# Altium PCB CLASS_AB.PcbDoc
Units mm, origin at the board's own origin, x right, y up, seen from the top; angles counter-clockwise.
Board outline 85.72 x 49.91 mm, 2 copper layers (Top Layer, Bottom Layer); 29 components, 15 nets, 63 pads, 0 vias.
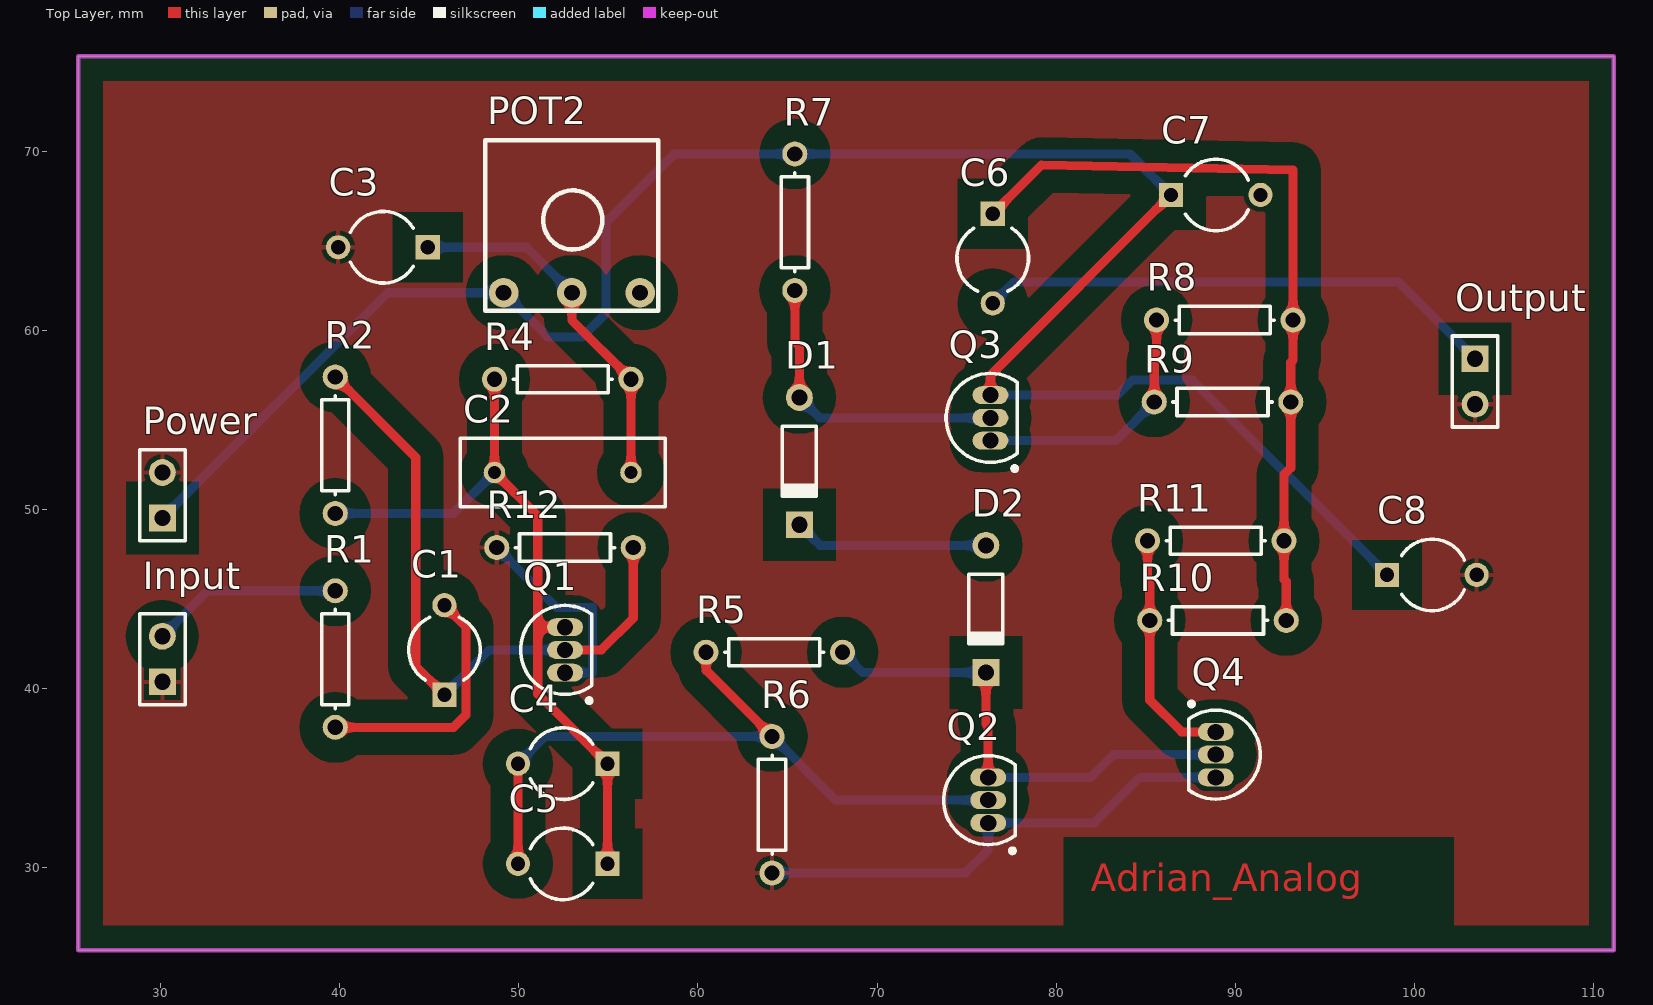
[diagram p0: Top Layer view]
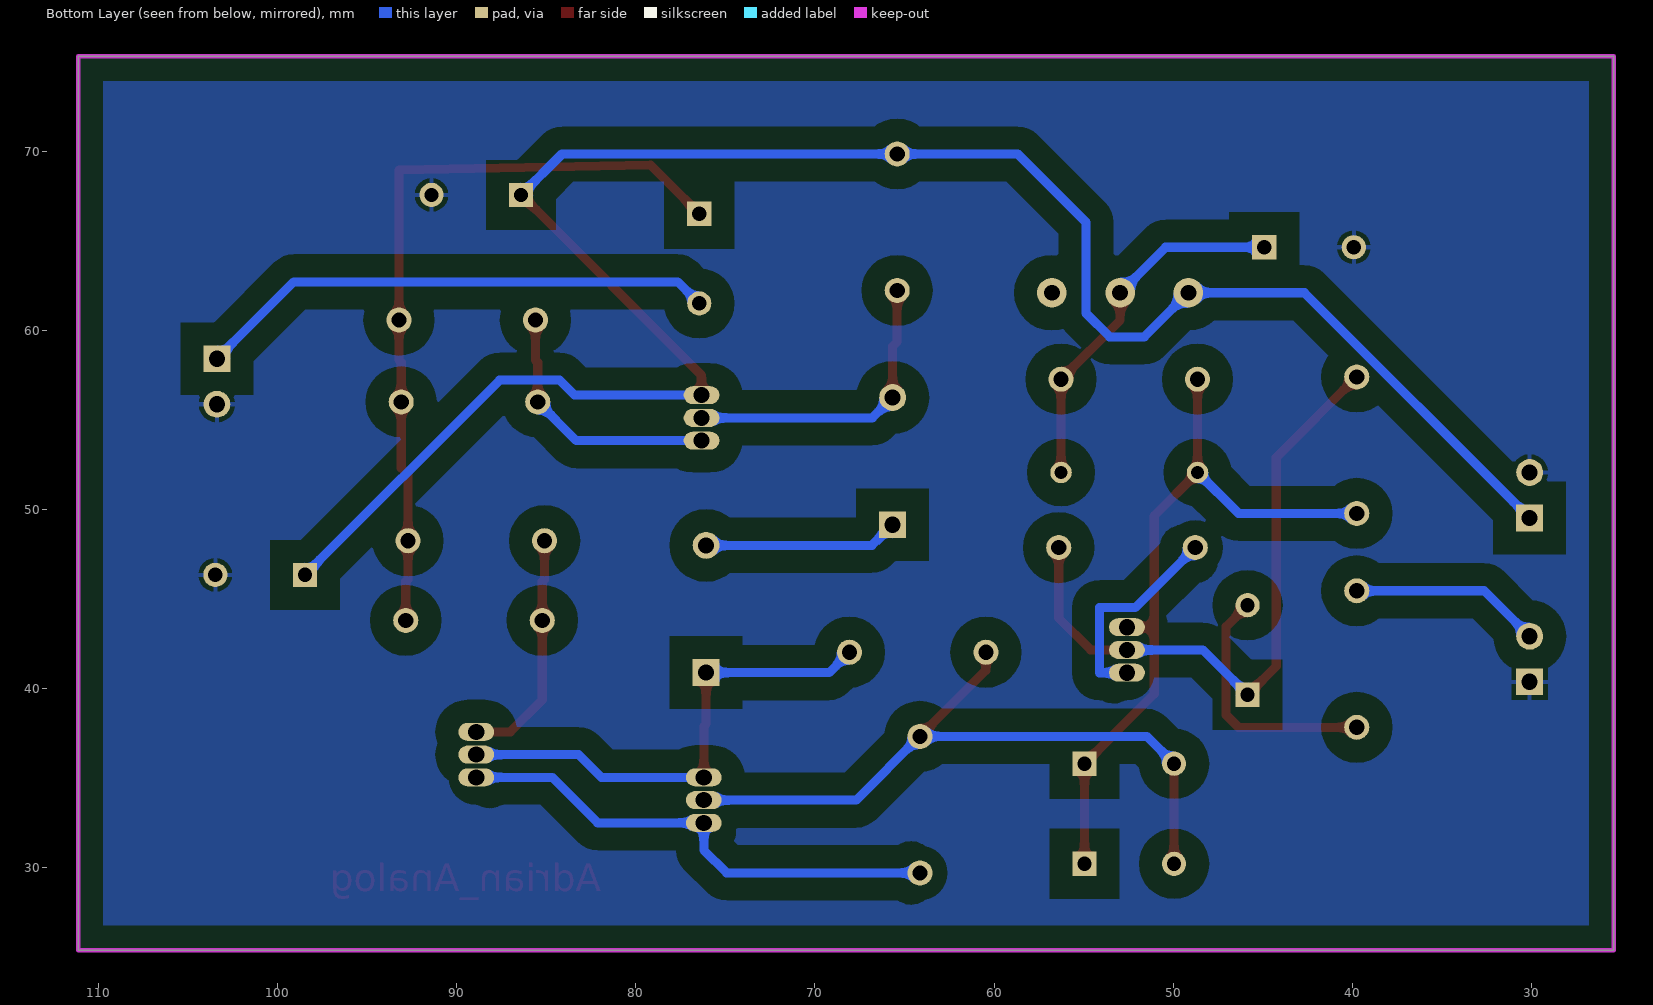
[diagram p1: Bottom Layer view, seen from below]

## Layer stack, top to bottom
Top Solder: solder mask 0.0102, Solder Resist, Dk 3.5
Top Layer: signal copper 0.0356
Dielectric 1: dielectric 0.32, FR-4, Dk 4.8
Bottom Layer: signal copper 0.0356
Bottom Solder: solder mask 0.0102, Solder Resist, Dk 3.5

## Board outline
25.4,25.4 25.4,75.311 111.125,75.311 111.125,25.4

## Design rules (kind name [scope] priority, off if disabled: settings)
Clearance "Copper Pour" [InPolygon] p1: gap=1.27
Clearance [All] p2: gap=0.254
PolygonConnect [All] p1: connectstyle=Relief reliefconductorwidth=0.254 reliefentries=4 polygonreliefangle="90 Angle" airgapwidth=0.254
RoutingVias [All] p1: holewidth=0.711 width=1.27 viastyle="Through Hole" minholewidth=0.711 minwidth=1.27 maxholewidth=0.711 maxwidth=1.27
SolderMaskExpansion [All] p1: expansion=0.102
Width [All] p1: maxlimit=0.508 minlimit=0.508 preferedwidth=0.508
30 further rules are at their usual default settings.

## Components (designator, comment, footprint, x,y, rotation, side; value= is the part's Value field where it differs from the comment)
C1 "Cap2" CAPR5-4X5 45.847,42.164 r90 top
C2 "Cap" RAD-0.3 52.451,52.07 r0 top
C3 "Cap2" CAPR5-4X5 42.418,64.643 r180 top
C4 "Cap2" CAPR5-4X5 52.451,35.814 r180 top
C5 "Cap2" CAPR5-4X5 52.451,30.226 r180 top
C6 "Cap2" CAPR5-4X5 76.454,64.008 r270 top
C7 "Cap2" CAPR5-4X5 88.9,67.564 r0 top
C8 "Cap2" CAPR5-4X5 100.965,46.355 r0 top
D1 "Diode 1N914" DO-35 65.659,52.705 r270 top
D2 "Diode 1N914" DO-35 76.073,44.45 r270 top
Input "Header 2" HDR1X2 30.099,40.386 r90 top
Output "Header 2" HDR1X2 103.378,58.42 r270 top
POT2 "RPot_1" "POT inline wide" 50.419,62.103 r0 top
Power "Header 2" HDR1X2 30.099,49.53 r90 top
Q1 "2N2222" TO-92A 52.578,42.164 r0 top
Q2 "2N2222" TO-92A 76.2,33.782 r0 top
Q3 "2N2222" TO-92A 76.327,55.118 r0 top
Q4 "2N2907" TO-92A 88.9,36.322 r180 top
R1 "Res1" AXIAL-0.3 39.751,41.656 r270 top
R2 "Res2" AXIAL-0.3 39.751,53.594 r90 top
R4 "Res4" AXIAL-0.3 52.451,57.277 r180 top
R5 "Res5" AXIAL-0.3 64.262,42.037 r180 top
R6 "Res6" AXIAL-0.3 64.135,33.528 r90 top
R7 "Res7" AXIAL-0.3 65.405,66.04 r90 top
R8 "Res8" AXIAL-0.3 89.408,60.579 r180 top
R9 "Res9" AXIAL-0.3 89.281,56.007 r180 top
R10 "Res10" AXIAL-0.3 89.027,43.815 r180 top
R11 "Res11" AXIAL-0.3 88.9,48.26 r180 top
R12 "Res2" AXIAL-0.3 52.578,47.879 r180 top

## Footprints (in the part's own frame and the unit in brackets; to place one, negate y for a bottom-side part, rotate by r counter-clockwise, add the part's x,y. Pads: shape width x height; smd on the part's side, far side on the other; paste and mask are expansions set on the pad)
AXIAL-0.3 [mm] "Axial Device, Thru-Hole; 2 Leads; 0.3 in Pin Spacing"
  round 1.4 hole 0.85: 1(-3.81,0) 2(3.81,0)
  silkscreen extent -2.77,-0.76 2.77,0.76
CAPR5-4X5 [mm] "Capacitor; 2 Leads"
  rect 1.35x1.35 hole 0.8: 1(-2.5,0)
  round 1.35 hole 0.8: 2(2.5,0)
  silkscreen extent -1.69,-2 1.82,2
DO-35 [mm] "Diode, Axial; Body 3.8 x 1.9 mm (LxDia. max), Lead Dia. 0.53 mm (max)"
  round 1.5 hole 0.9: 1(-3.55,0)
  rect 1.5x1.5 hole 0.9: 2(3.55,0)
  silkscreen extent -1.95,-0.95 2.05,0.95
HDR1X2 [mm] "Connector; Header; 2 Position"
  rect 1.5x1.5 hole 0.9: 1(0,0)
  round 1.5 hole 0.9: 2(2.54,0)
  silkscreen extent -1.27,-1.27 3.81,1.27
"POT inline wide" [mil]
  round 65 hole 35: 1(-50,0) 2(100,0) 3(250,0)
  silkscreen extent -90,-40 290,335
RAD-0.3 [mm] "Radial Cap, Thru-Hole; 2 Leads; 0.3 in Pin Spacing"
  round 1.2 hole 0.7: 1(-3.81,0) 2(3.81,0)
  silkscreen extent -5.71,-1.91 5.71,1.91
TO-92A [mm] "TO, Flat Index; 3 In-Line, Axial Leads; Body Dia. 4.5mm; Leads 0.51 x 0.48 mm (max)"
  oval 2x1 hole 0.9: 1(0,-1.27) 2(0,0) 3(0,1.27)
  silkscreen extent -2.48,-2.95 1.5,2.48, body extent -2.48,-2.5 1.5,2.5, height 6.86

## Part data
C1 C2 C3 C4 C5 C6 C7 C8: "Capacitor"
D1 D2: "High Conductance Fast Diode"
Input Output Power: "Header, 2-Pin"
POT2: library part RPot_3, "Potentiometer"
Q1 Q2 Q3: library part 2N3904, "NPN General Purpose Amplifier"
Q4: library part 2N3906, "PNP General Purpose Amplifier"
R1: "Resistor"
R2 R4 R5 R6 R7 R8 R9 R10 R11 R12: library part Res1, "Resistor"

## Nets (pads, with @x,y where several pads share a name; then routed paths per layer and width w, separated by ;. In a path a pad name is that pad's centre, name@x,y a point inside that pad or via, vN(x,y) a via of type N, cw(c..) or ccw(c..) an arc to the next point about the centre after c; other vN are vias at no path point)
GND: C3.2 C7.2 C8.2 Input.1 Output.2 Power.2 Q1.1 Q2.1 Q4.3 R6.1 R12.2 | length 39.7
  Bottom Layer w0.508: R12.2 52.121,44.526 54.102,44.526 54.102,40.894 Q1.1 ; R6.1 74.93,29.718 76.2,30.988 Q2.1 82.118,32.512 84.658,35.052 Q4.3
NetC1_1: C1.1 Q1.2 R2.2 R12.1 | length 36.5
  Top Layer w0.508: R2.2 44.247,52.908 44.247,41.264 C1.1 ; Q1.2 54.61,42.164 56.388,43.942 R12.1
  Bottom Layer w0.508: C1.1 48.347,42.164 Q1.2
NetC1_2: C1.2 R1.2 | length 14.2
  Top Layer w0.508: R1.2 46.355,37.846 47.041,38.532 47.041,43.47 C1.2
NetC2_1: C2.1 C4.1 C5.1 Q1.3 R2.1 R4.2 | length 41
  Top Layer w0.508: R4.2 C2.1 51.054,49.657 51.054,43.434 ; Q1.3 51.054,43.434 ; C5.1 C4.1 51.054,39.711 51.054,43.434
  Bottom Layer w0.508: R2.1 46.355,49.784 C2.1
NetC2_2: C2.2 C3.1 POT2.2 R4.1 | length 20.5
  Top Layer w0.508: POT2.2 52.959,60.579 R4.1 C2.2
  Bottom Layer w0.508: C3.1 50.419,64.643 POT2.2
NetC4_2: C4.2 C5.2 Q2.2 R5.2 R6.2 | length 40.2
  Top Layer w0.508: C5.2 C4.2 ; R5.2 60.452,41.021 R6.2
  Bottom Layer w0.508: C4.2 51.475,37.338 R6.2 67.691,33.782 Q2.2
NetC6_1: C6.1 R8.1 R9.1 R10.1 R11.1 | length 43.3
  Top Layer w0.508: C6.1 79.186,69.24 93.218,68.961 R8.1 93.218,58.344 93.091,58.217 R9.1 93.091,52.324 92.71,51.943 R11.1 92.71,46.101 92.837,45.974 R10.1
NetC6_2: C6.2 Output.1 | length 29.2
  Bottom Layer w0.508: C6.2 77.659,62.713 99.085,62.713 Output.1
NetD1_1: D1.1 Q3.2 R7.1 | length 17.2
  Top Layer w0.508: R7.1 65.405,59.36 65.659,59.106 D1.1
  Bottom Layer w0.508: D1.1 66.796,55.118 Q3.2
NetD1_2: D1.2 D2.1 | length 10.9
  Bottom Layer w0.508: D1.2 66.814,48 D2.1
NetD2_2: D2.2 Q2.3 Q4.2 R5.1 | length 27.6
  Top Layer w0.508: D2.2 76.073,38.024 76.2,37.897 Q2.3
  Bottom Layer w0.508: R5.1 69.209,40.9 D2.2 ; Q2.3 81.915,35.052 83.185,36.322 Q4.2
NetInput_2: Input.2 R1.1 | length 10.7
  Bottom Layer w0.508: Input.2 32.639,45.466 R1.1
NetQ3_1: Q3.1 R8.2 R9.2 | length 14.7
  Top Layer w0.508: R9.2 85.471,58.217 85.598,58.344 R8.2
  Bottom Layer w0.508: Q3.1 83.312,53.848 R9.2
NetQ4_1: Q4.1 R10.2 R11.2 | length 13.4
  Top Layer w0.508: R11.2 85.09,46.101 85.217,45.974 R10.2 85.217,39.37 86.995,37.592 Q4.1
VCC: C7.1 C8.1 POT2.1 Power.1 Q3.3 R7.2 | length 113
  Top Layer w0.508: Q3.3 76.327,57.491 C7.1
  Bottom Layer w0.508: Power.1 42.672,62.103 POT2.1 51.613,59.639 53.543,59.639 54.864,60.96 54.864,66.04 58.674,69.85 R7.2 84.114,69.85 C7.1 ; Q3.3 83.414,56.388 84.252,57.226 87.594,57.226 C8.1
pads on no net: POT2.3

## Polygon pours and split planes (outlines as drawn)
GND on Top Layer "Keep-Out Layer-No Net" (solid, pour order 0): 111.125,75.311 25.4,75.311 25.4,25.654 25.654,25.4 111.125,25.4 111.125,75.311
GND on Bottom Layer "Keep-Out Layer-No Net" (solid, pour order 2): 25.4,75.311 25.4,25.4 110.871,25.4 111.125,25.654 111.125,75.311 25.654,75.311

## Keep-outs
Keep-Out Layer:
  the board outline again, w0.254

## Other copper
Top Layer:
  text "Adrian_Analog" at 81.915,28.702 h1.52